# Altium PCB PCB3.PcbDoc
Units mm, origin at the board's own origin, x right, y up, seen from the top; angles counter-clockwise.
Board outline 64.01 x 99.31 mm, 4 copper layers (Top Layer, Layer 1, Layer 2, Bottom Layer), stack 0.603 mm thick; 84 components, 38 nets, 245 pads, 46 vias.
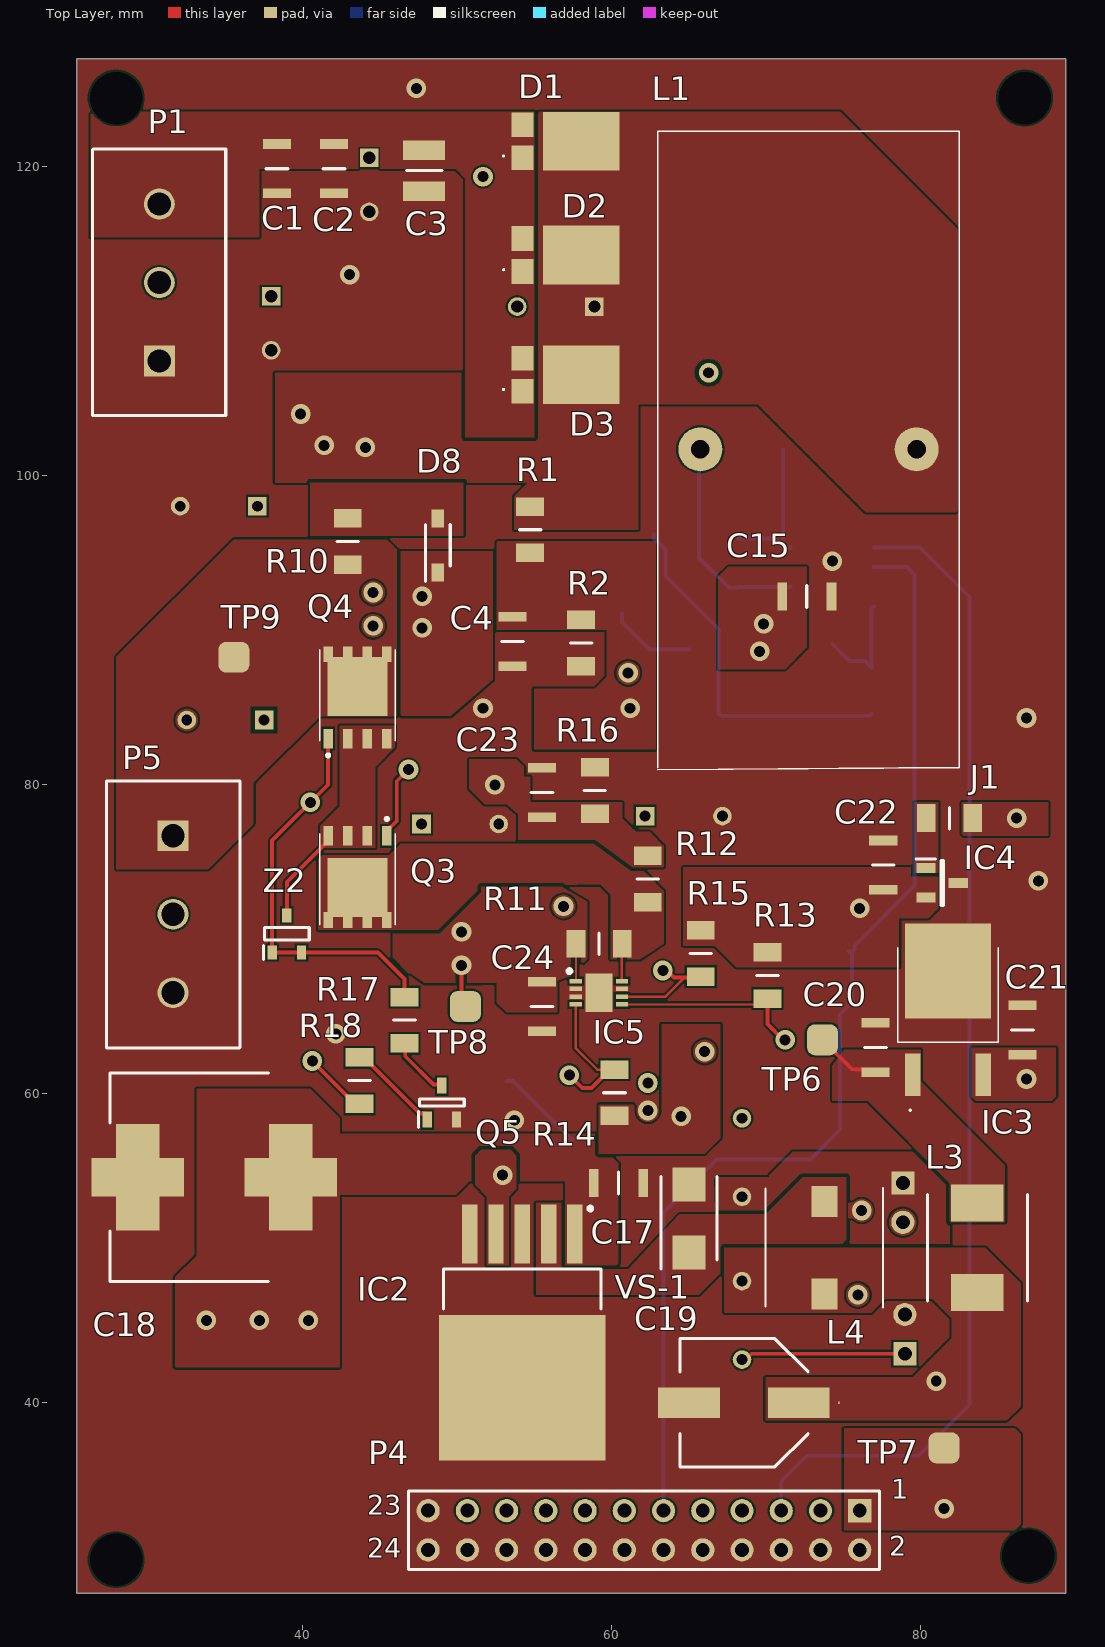
[diagram p0: Top Layer view]
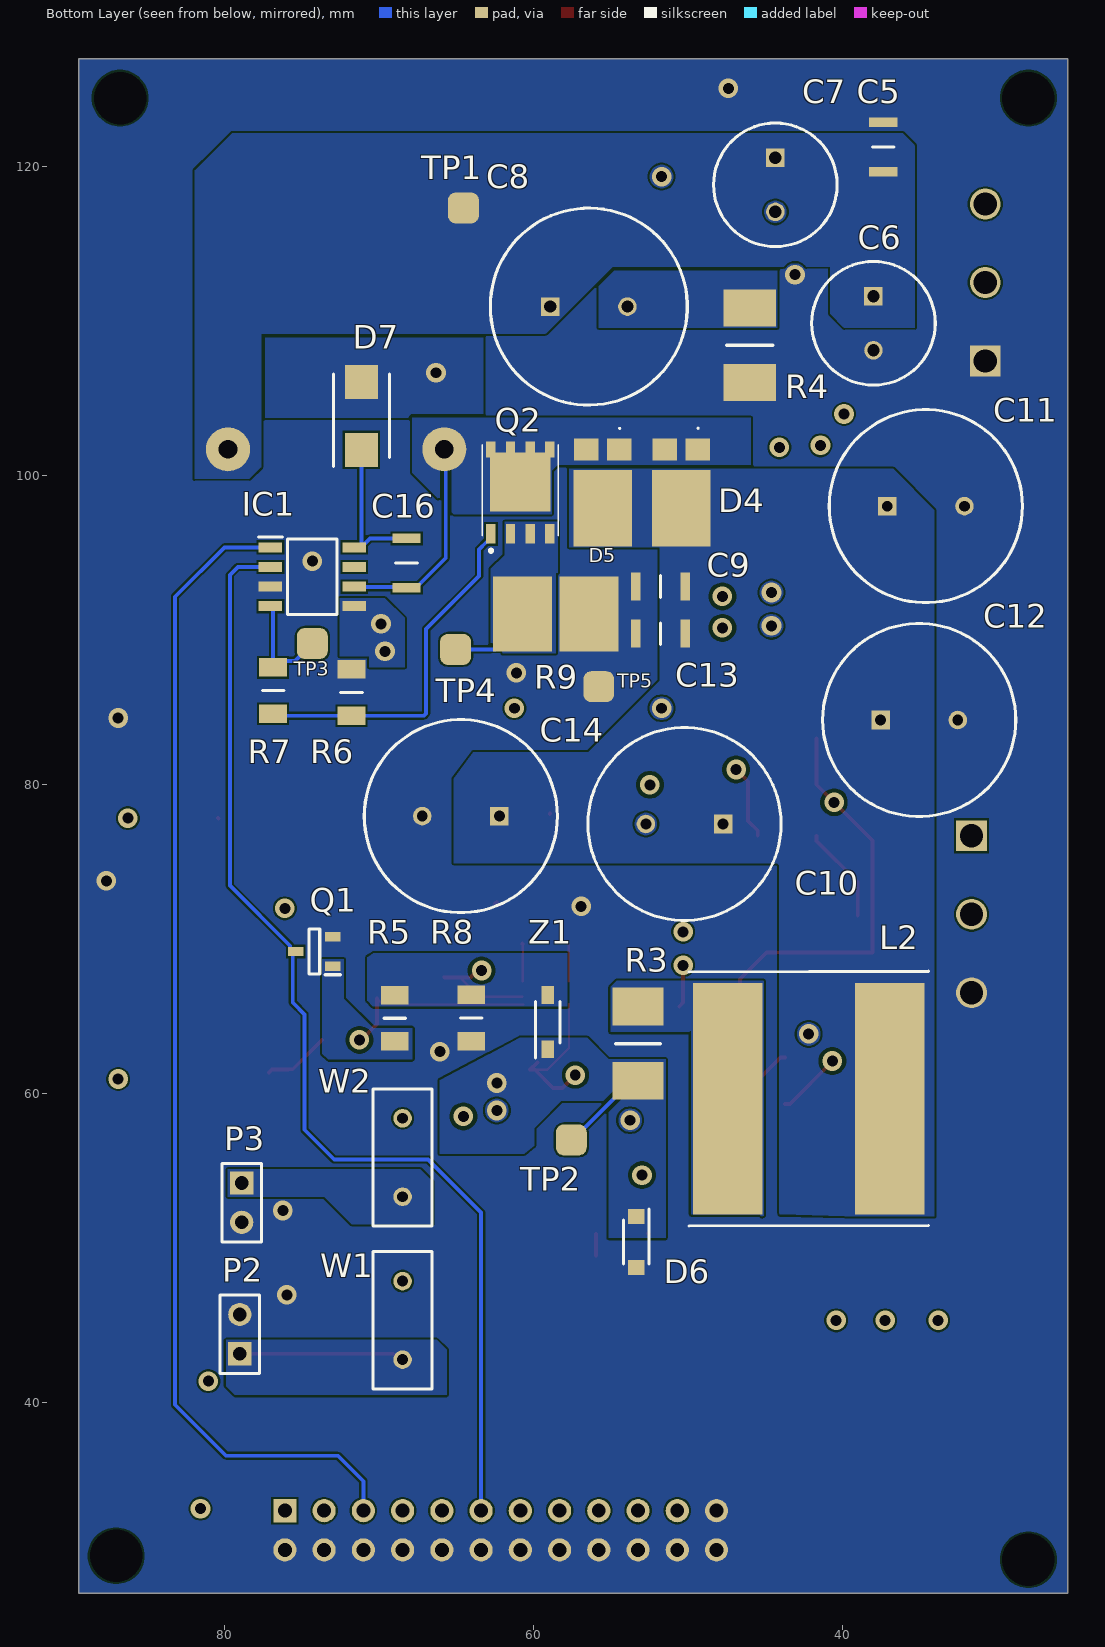
[diagram p1: Bottom Layer view, seen from below]
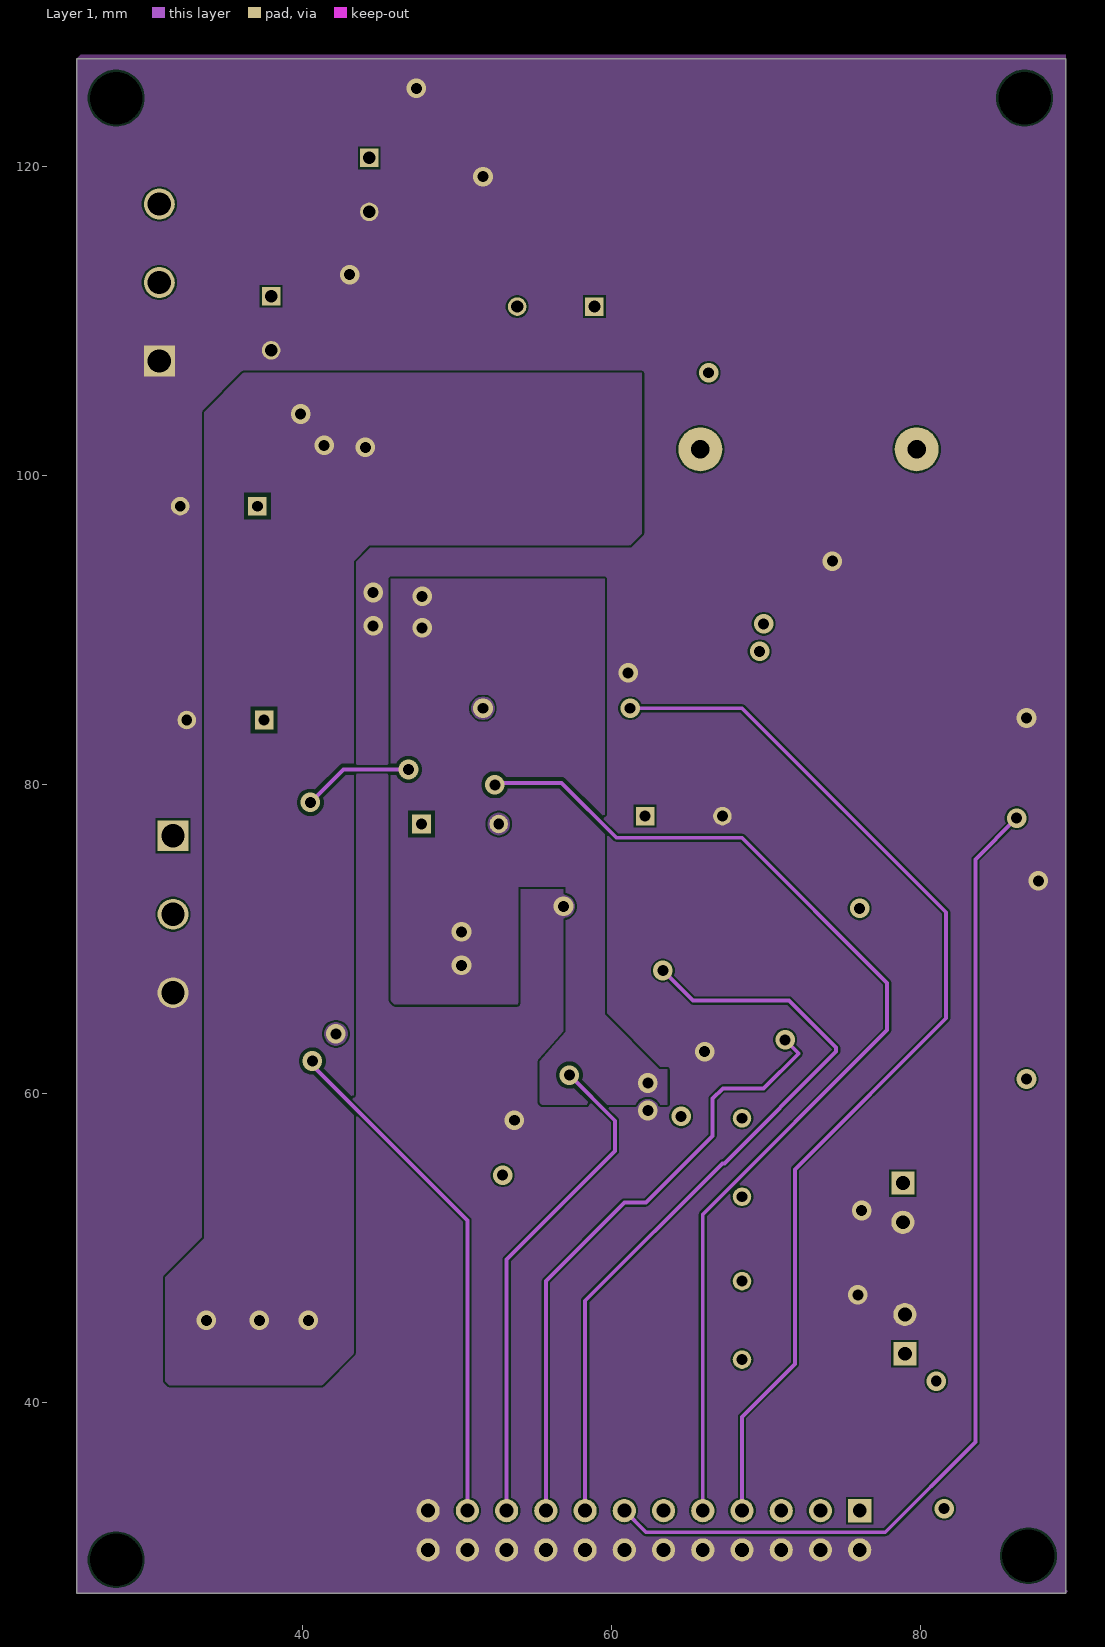
[diagram p2: Layer 1]
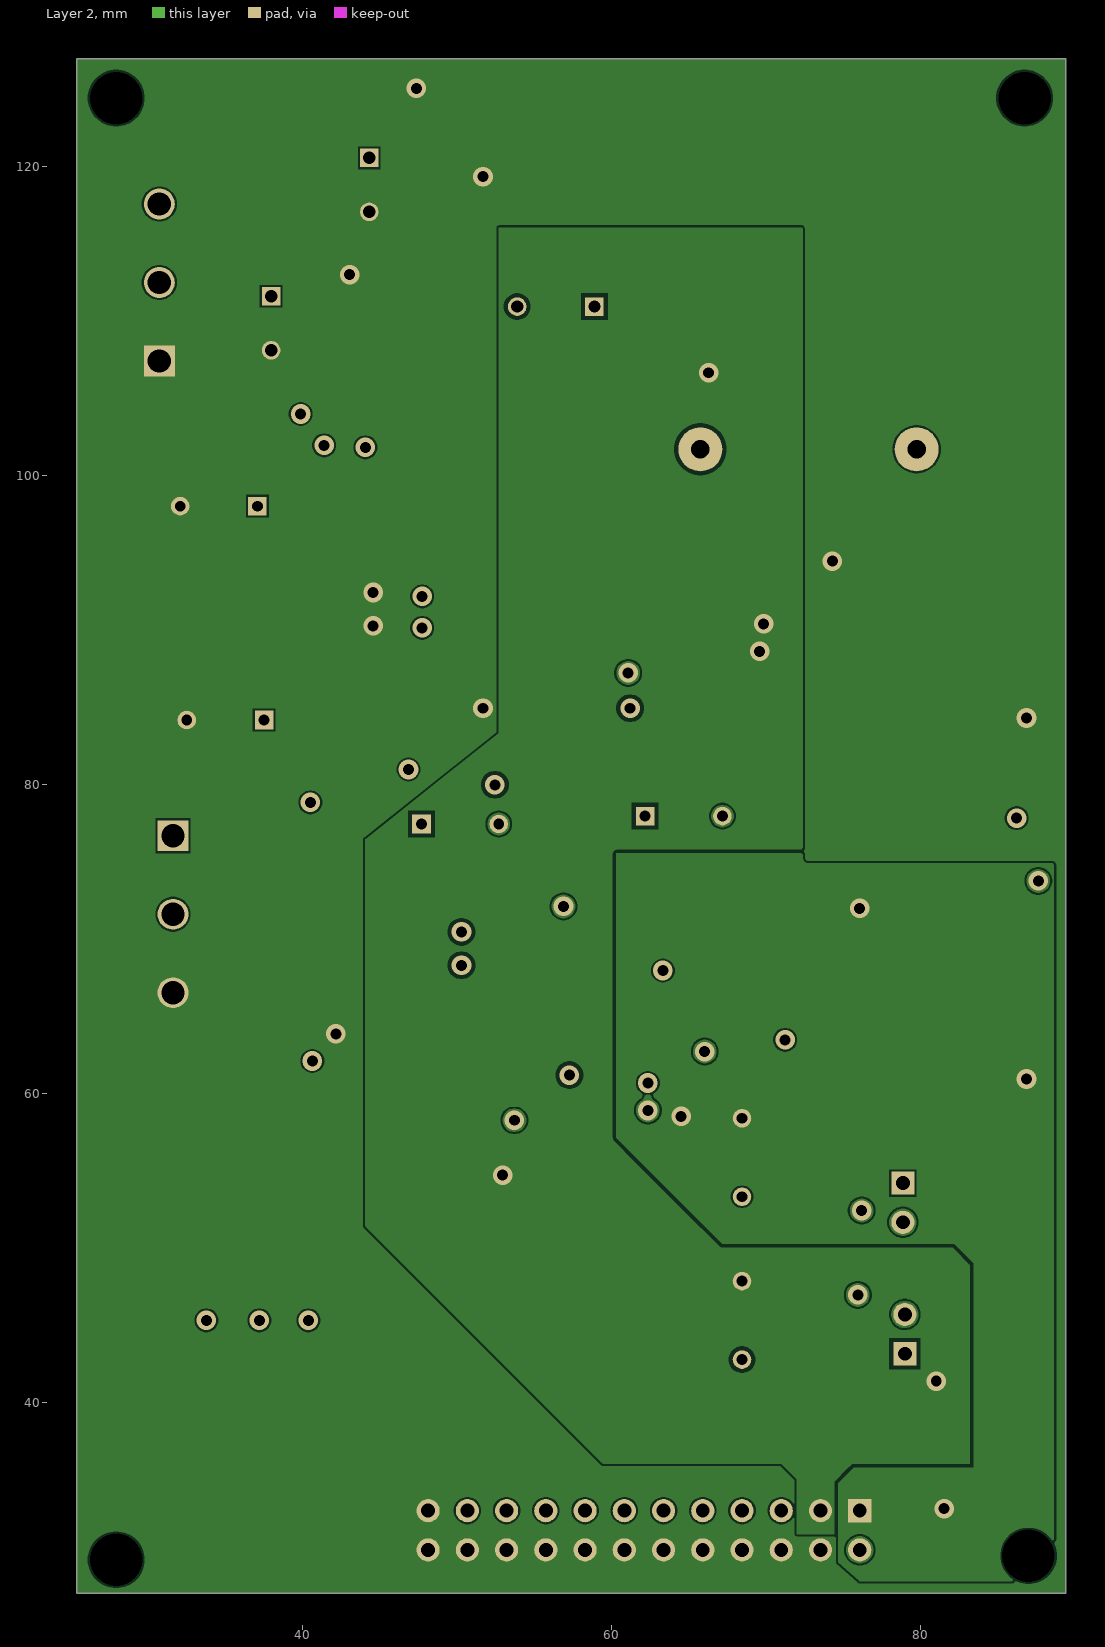
[diagram p3: Layer 2]
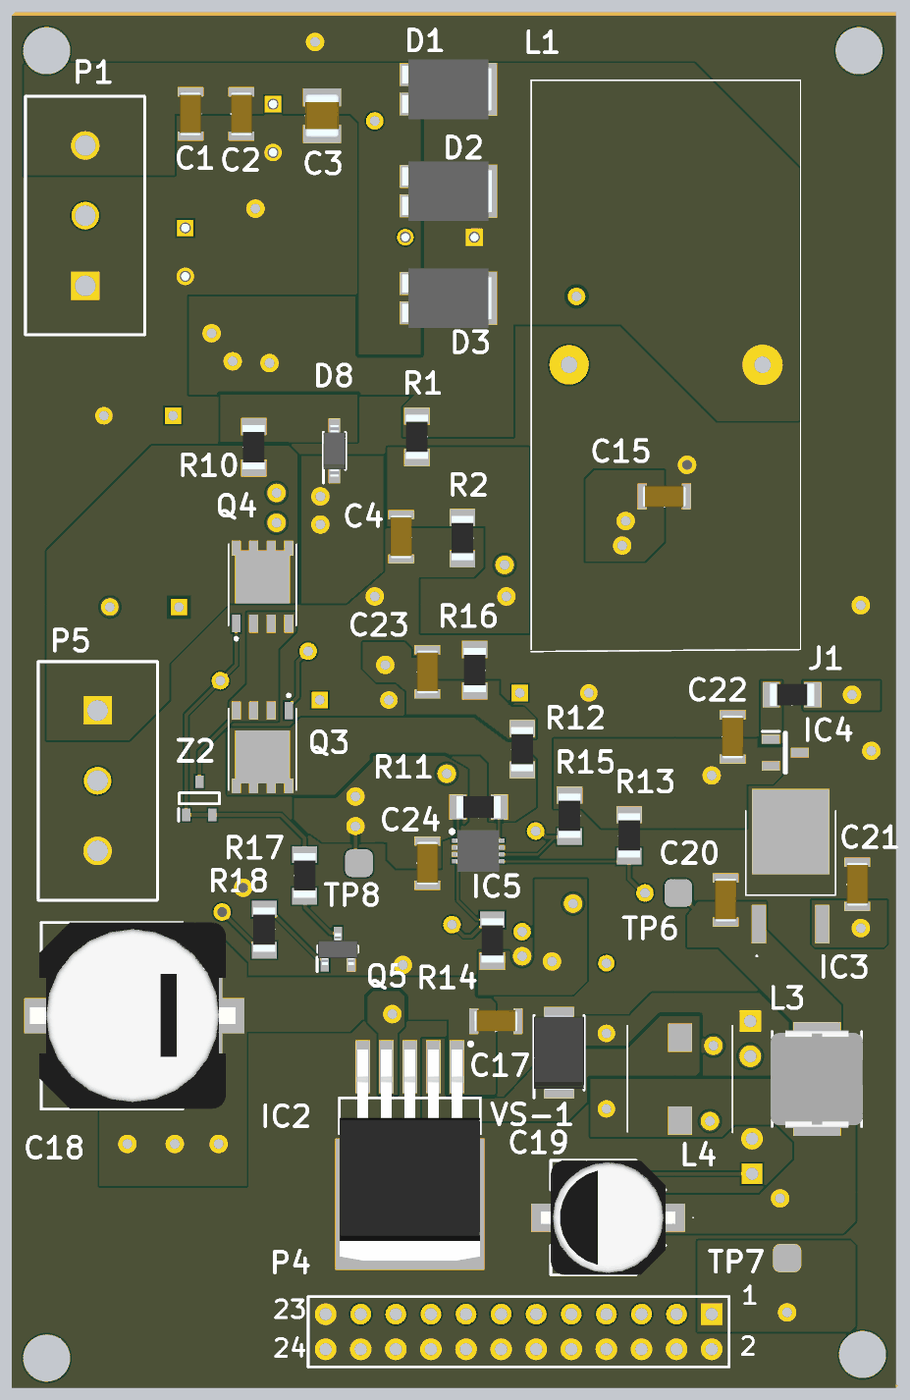
[diagram p4: 3D render of the assembled board from above, using the file's embedded part models]
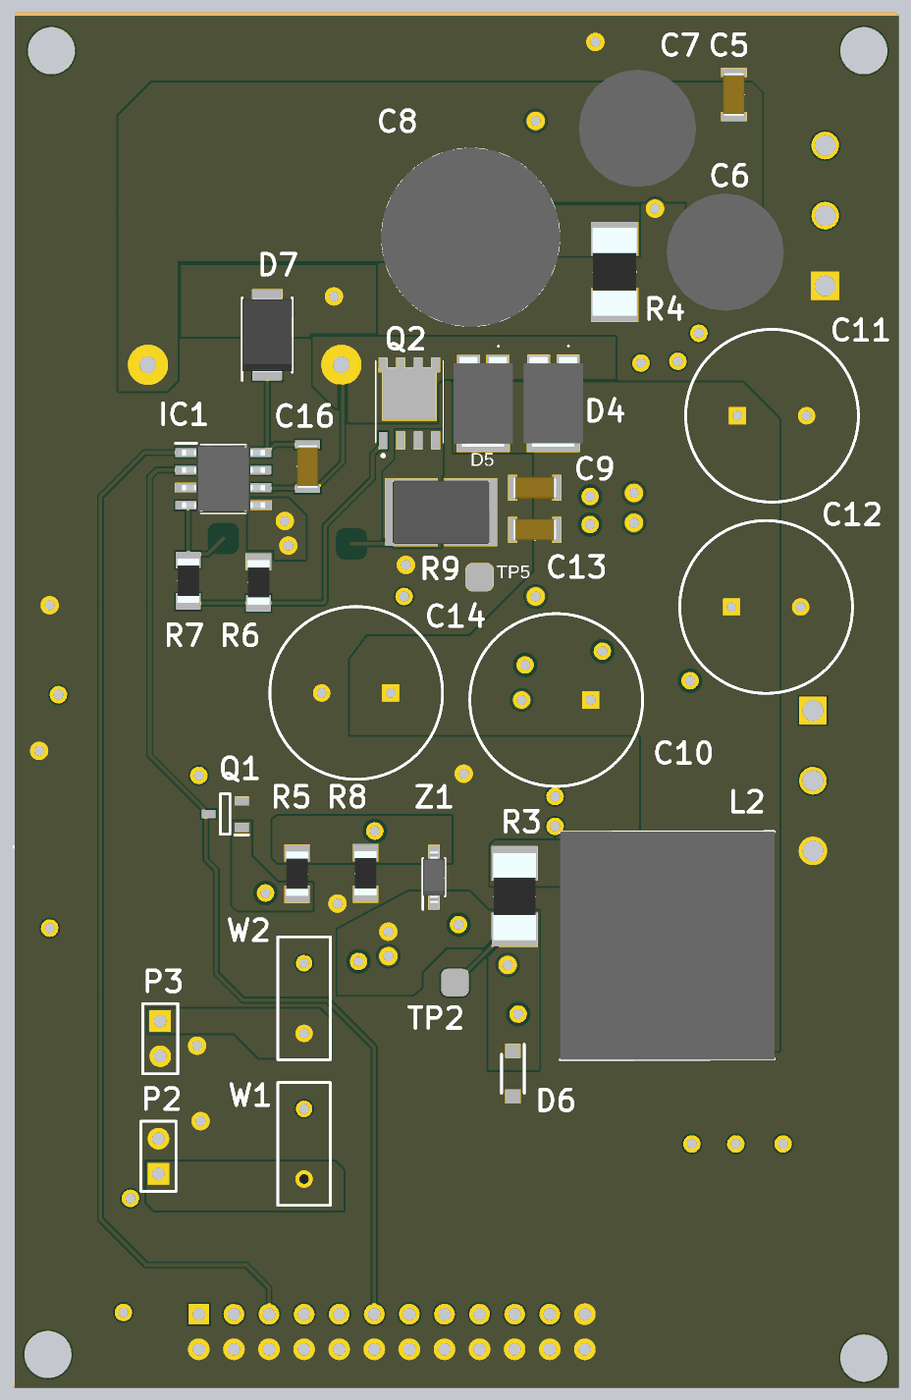
[diagram p5: 3D render of the assembled board from below, using the file's embedded part models]

## Layer stack, top to bottom
Top Solder: solder mask 0.0102, Solder Resist, Dk 3.5
Top Layer: signal copper 0.0356
Dielectric 2: prepreg 0.0711, PP-006, Dk 4.1
Layer 1: signal copper 0.035
Dielectric 1: dielectric 0.32, FR-4, Dk 4.8
Layer 2: signal copper 0.035
Dielectric 3: prepreg 0.0711, PP-006, Dk 4.1
Bottom Layer: signal copper 0.0356
Bottom Solder: solder mask 0.0102, Solder Resist, Dk 3.5

## Board outline
25.4,27.686 25.4,127 89.408,127 89.408,27.686

## Design rules (kind name [scope] priority, off if disabled: settings)
Clearance [All] p1: gap=0.125 ignorepadtopadclearanceinfootprint=FALSE except(0: Arc-Hole Track-Hole SMDPad-Hole THPad-Hole Via-Hole Fill-Hole Poly-Hole Region-Hole Text-Hole)
DiffPairsRouting [All] p1: maxlimit=10 minlimit=0.125 mostfreqgap=0.15 toplayer_minwidth=0.381 toplayer_maxwidth=0.381 toplayer_prefwidth=0.381 midlayer1_minwidth=0.381 midlayer1_maxwidth=0.381 midlayer1_prefwidth=0.381 midlayer2_minwidth=0.381 midlayer2_maxwidth=0.381 midlayer2_prefwidth=0.381 bottomlayer_minwidth=0.381 bottomlayer_maxwidth=0.381 bottomlayer_prefwidth=0.381 maxuncoupledlength=12.7
FabricationTestPointUsage FabricationTestPointUsage_1 [All] p1: valid=0 allowmultiple=FALSE
FabricationTestpoint FabricationTestpoint_1 [All] p1: side=3 testpointundercomponent=TRUE minsize=1.016 maxsize=2.54 preferedsize=1.524 minholesize=0 maxholesize=1.016 preferedholesize=0.813 testpointgrid=0.025 allowsidetop=TRUE allowsidebottom=TRUE usegrid=TRUE gridtolerance=0
Height [All] p1: minheight=0 maxheight=50 prefheight=12.7
HoleSize [All] p1: absolutevalues=TRUE maxlimit=6 minlimit=0.2 maxpercent=80.000 minpercent=20.000
HoleSize FabricationTestpoint [All] p2 off: absolutevalues=TRUE maxlimit=2.54 minlimit=0.025 maxpercent=80.000 minpercent=20.000
HoleSize FabricationTestPointUsage [All] p3 off: absolutevalues=TRUE maxlimit=2.54 minlimit=0.025 maxpercent=80.000 minpercent=20.000
MinimumSolderMaskSliver [All] p1: minsoldermaskwidth=0.07
MinimumSolderMaskSliver SilkscreenOverComponentPads [All] p2: minsoldermaskwidth=0.254
PlaneClearance [All] p1: clearance=0.5
PlaneConnect [All] p1: planeconnectstyle=Direct reliefexpansion=0.4 reliefentries=4 reliefconductorwidth=0.15 reliefairgap=0.15
PolygonConnect [All] p1: connectstyle=Direct reliefconductorwidth=0.15 reliefentries=4 polygonreliefangle="90 Angle" airgapwidth=0.254
RoutingCorners [All] p1: cornerstyle=45-Degree minsetback=1.25 maxsetback=1.25
RoutingVias [All] p1: holewidth=0.3 width=0.6 viastyle="Through Hole" minholewidth=0.2 minwidth=0.45 maxholewidth=0.45 maxwidth=0.75
SilkToSolderMaskClearance [IsPad] p1: minsilkscreentomaskgap=0.1 clearancetoexposedcopper=TRUE
SolderMaskExpansion [All] p1: expansion=0.03 istentingtop=FALSE
Width [All] p1: maxlimit=10 minlimit=0.125 preferedwidth=0.15
20 further rules are at their usual default settings.

## Classes and differential pairs
component class U_Power_Supply: C17 C18 C19 C20 C21 C22 IC2 IC3 IC4 J1 L3 L4 P2 P3 TP6 TP7 VS-1 W1 W2
component class U_Output_Stage: C23 C24 D8 IC5 P5 Q3 Q4 Q5 R10 R11 R12 R13 R14 R15 R16 R17 R18 TP8 TP9 Z2
component class U_Input_Stage: C1 C2 C3 C4 D1 D2 D3 P1 R1 R2
component class U_Boost_Converter: C5 C6 C7 C8 C9 C10 C11 C12 C13 C14 C15 C16 D4 D5 D6 D7 IC1 L1 L2 Q1 Q2 R3 R4 R5 R6 R7 R8 R9 TP1 TP2 TP3 TP4 TP5 Z1

## Components (designator, comment, footprint, x,y, rotation, side; value= is the part's Value field where it differs from the comment)
C1 "10nF" CAPC3216X180N 38.354,119.888 r90 top value=100nF
C2 "100µF" CAPC3216X180N 42.037,119.888 r90 top value=10nF
C3 "GRM32EC72A106KE05K" CAPC3225X270N 47.879,119.761 r90 top value=10uF
C4 "220pF" CAPC3216X180N 53.594,89.281 r90 top
C5 "CC1206KKX7R0BB104" CAPC3216X180N 37.338,121.285 r90 bottom value=100nF
C6 "870056174001" 870056174001 37.973,111.633 r270 bottom value=10µF
C7 "870056174001" 870056174001 44.323,120.594 r270 bottom value=10µF
C8 "100ZLJ220M12.5X25" CAPPRD500W60D1275H2700 58.899,110.964 r180 bottom value=220uF
C9 "CC1206KKX7R0BB104" CAPC3216X180N 51.765,92.837 r0 bottom value=100nF
C10 "EGXF251ELL680MK30S" EGXF251ELL680MK30S 47.705,77.47 r0 bottom value=68µF
C11 "EGXF251ELL680MK30S" EGXF251ELL680MK30S 37.084,98.044 r180 bottom value=68µF
C12 "EGXF251ELL680MK30S" EGXF251ELL680MK30S 37.512,84.201 r180 bottom value=68µF
C13 "C1206C105M5REC7210" CAPC3216X180N 51.765,89.789 r180 bottom value=1µF
C14 "EGXF251ELL680MK30S" EGXF251ELL680MK30S 62.183,77.978 r0 bottom value=68µF
C15 "100nF" CAPC3216X180N 72.644,92.202 r180 top
C16 "330nF" CAPC3216X180N 68.199,94.361 r90 bottom
C17 "CC1206KKX7R0BB104" CAPC3216X180N 60.452,54.229 r180 top value=100nF
C18 "EEV-FK1K101V" EEEFK0J332AV 34.29,54.61 r90 top value=100µF
C19 "EEEFK1E331P" EEE0JA471UAP 68.58,40.005 r180 top value=330µF
C20 "C1206C105M5REC7210" CAPC3216X180N 77.089,62.992 r270 top value=1µF
C21 "CC1206KKX7R0BB104" CAPC3216X180N 86.614,64.135 r270 top value=100nF
C22 "CC1206KKX7R0BB104" CAPC3216X180N 77.597,74.803 r270 top value=100nF
C23 "220pF" CAPC3216X180N 55.499,79.502 r270 top
C24 "CC1206KKX7R0BB104" CAPC3216X180N 55.499,65.659 r90 top value=100nF
D1 "PMEG45U10" PMEG45U10EPDZ 57.019,121.666 r270 top
D2 "PMEG45U10" PMEG45U10EPDZ 57.023,114.3 r270 top
D3 "PMEG45U10" PMEG45U10EPDZ 57.019,106.553 r270 top
D4 "PMEG100V100ELPDAZ" PMEG100V100ELPDAZ 50.419,98.937 r0 bottom
D5 "PMEG100V100ELPDAZ" PMEG100V100ELPDAZ 55.499,98.933 r0 bottom
D6 "SMF4L60A-Q" SODFL3716X135N 53.34,50.419 r270 bottom
D7 "VS-10BQ060-M3_5BT" DIOM5436X244N 71.12,103.886 r90 bottom
D8 "1N4148W-G3-08" SOD3716X135N 48.768,95.504 r90 top
IC1 "IR7184STRPBF" SOIC127P600X175-8N 74.295,93.472 r180 bottom
IC2 "TL2575HV-12IKTTR" TO170P1524X483-6N 54.229,44.527 r270 top
IC3 "UA78M33CKVURG3" TPS7A6533QKVURQ1 81.788,61.245 r90 top
IC4 "MCP100T-315I_TT" SOT96P237X112-3N 81.407,73.66 r0 top
IC5 "LTC2944CDD#PBF" SON50P300X300X80-9N-D 59.182,66.548 r0 top
J1 "MCWR12X000 PTL" RESC3216X75N 81.891,77.851 r0 top value=0
L1 "SHBC20-1R7A0054V" SHBC201R7A0054V 72.756,101.727 r180 top value=54uH
L2 "SRP1580CA-2R0M" SRP1510CA100M 42.164,59.69 r270 bottom value=2uH
L3 "22uH" INDPM6965X300N 83.693,50.038 r90 top
L4 "330uH" WE-PD_7332/7345_PLASTIC_BASE54 73.787,50.038 r0 top
P1 "MSTBVA2,5/3-G-5,08" HDR1X3 35.034,103.902 r90 top
P2 "Header 2" HDR1X2 78.994,43.18 r90 bottom
P3 "Header 2" HDR1X2 78.867,54.229 r270 bottom
P4 "Header 12X2" HDR2X12 76.073,33.02 r180 top
P5 "MSTBVA2,5/3-G-5,08" HDR1X3 27.323,80.248 r270 top
Q1 "MMBT2222ALT1G" SOT96P237X111-3N 74.168,69.215 r0 bottom
Q2 "SIR120DP-T1-RE3" SI7141DPT1GE3 60.833,99.06 r90 bottom
Q3 "SI7155DP-T1-GE3" SI7141DPT1GE3 43.561,73.898 r270 top
Q4 "SI7155DP-T1-GE3" SI7141DPT1GE3 43.561,85.81 r90 top
Q5 "FMMT493ATA" SOT95P230X110-3N 49.022,59.436 r90 top
R1 "100KΩ" RESC3216X75N 54.737,96.52 r90 top value=100k
R2 "8.2KΩ" RESC3216X75N 58.039,89.178 r90 top value=8.2k
R3 "CRM2512-FX-R100ELF" RESC6331X80N 53.213,63.246 r270 bottom value=100m
R4 "35221R0JT" RESC6432X120N 45.974,108.458 r90 bottom value=1
R5 "100Ω" RESC3216X75N 68.961,64.897 r270 bottom value=100
R6 "MCWR12X4702FTL" RESC3216X75N 71.755,85.979 r270 bottom value=47k
R7 "MCWR12W8R20FTL" RESC3216X75N 76.835,86.106 r270 bottom value=8.2
R8 "1KΩ" RESC3216X75N 64.008,64.921 r90 bottom value=1k
R9 "WSHM2818R0500FEB" RESC7146X175N 58.538,91.059 r0 bottom value=50m
R10 "MCWR12X1002FTL" RESC3216X75N 42.926,95.758 r270 top value=10k
R11 "ERJ8BWFR015V" RESC3216X75N 59.206,69.723 r0 top value=0.015
R12 "100KΩ" RESC3216X75N 62.357,73.914 r270 top value=100k
R13 "MCHP06W2F1001T5E" RESC3216X75N 70.104,67.667 r90 top value=1k
R14 "MCHP06W2F1001T5E" RESC3216X75N 60.198,60.071 r270 top value=1k
R15 "MCHP06W2F1001T5E" RESC3216X75N 65.786,69.088 r90 top value=1k
R16 "8.2KΩ" RESC3216X75N 58.928,79.629 r270 top value=8.2k
R17 "MCWR12X1003FTL" RESC3216X75N 46.609,64.77 r90 top value=100k
R18 "MCHP06W2F1001T5E" RESC3216X75N 43.688,60.857 r90 top value=1k
TP1 "test point" "Test point" 56.769,173.228 r180 bottom
TP2 "test point" "Test point" 49.784,112.903 r180 bottom
TP3 "test point" "Test point" 66.548,145.034 r180 bottom
TP4 "test point" "Test point" 57.277,144.653 r180 bottom
TP5 "test point" "Test point" 63.5,30.48 r0 bottom
TP6 "test point" "Test point" 81.407,119.38 r0 top
TP7 "test point" "Test point" 89.281,92.964 r0 top
TP8 "test point" "Test point" 58.293,121.539 r0 top
TP9 "test point" "Test point" 43.307,144.145 r0 top
VS-1 "Diode_2" DIOM5436X244N 65.024,51.943 r90 top
W1 "Jumper" RAD-0.2 68.453,45.339 r90 bottom
W2 "Jumper" RAD-0.2 68.453,55.88 r90 bottom
Z1 "MMSZ5263BT1G" SOD3716X135N 59.055,64.643 r90 bottom
Z2 "BZX84C12VLFHT116" SOT95P240X115-3N 38.989,70.358 r90 top

## Footprints (in the part's own frame and the unit in brackets; to place one, negate y for a bottom-side part, rotate by r counter-clockwise, add the part's x,y. Pads: shape width x height; smd on the part's side, far side on the other; paste and mask are expansions set on the pad)
870056174001 [mm] "10uF"
  rect 1.2x1.2 hole 0.8: 1(0,0)
  round 1.2 hole 0.8: 2(3.5,0)
  silkscreen extent -2.25,-4 5.75,4, body extent -2.5,-4.25 6,4.25, height 9
CAPC3216X180N [mm]
  rect 0.62x1.82 smd: 1(-1.6,0) 2(1.6,0)
  silkscreen extent 0,-0.7 0,0.7, body extent -1.6,-0.8 1.6,0.8, height 1.8
CAPC3225X270N [mm]
  rect 1.26x2.72 smd: 1(-1.33,0) 2(1.33,0)
  silkscreen extent 0,-1.15 0,1.15, body extent -1.6,-1.25 1.6,1.25, height 2.7
CAPPRD500W60D1275H2700 [mm]
  rect 1.2x1.2 hole 0.8: 1(0,0)
  round 1.2 hole 0.8: 2(5,0)
  silkscreen extent -3.88,-6.37 8.87,6.37, body extent -4,-6.5 9,6.5, height 27
DIOM5436X244N [mm]
  rect 2.2x2.15 smd: 1(-2.2,0) 2(2.2,0)
  silkscreen extent -3.27,-1.81 2.7,1.81, body extent -2.7,-1.81 2.7,1.81, height 2.44
EEE0JA471UAP [mm]
  rect 4x2 smd: 1(-3.55,0) 2(3.55,0)
  silkscreen extent -6.18,-4.15 4.15,4.15, body extent 0,0 0,0
EEEFK0J332AV [mm]
  rect 2.2x2.8 smd: 1(-2.35,-4.95) 1(2.35,-4.95) 2(-2.35,4.95) 2(2.35,4.95)
  rect 2.5x6 smd: 1(0,-4.95) 2(0,4.95)
  silkscreen extent -6.75,-3.5 6.75,6.75, body extent -6.73,-7.32 6.77,7.58, height 13.8
EGXF251ELL680MK30S [mm] "68uF"
  rect 1.2x1.2 hole 0.7: 1(0,0)
  round 1.2 hole 0.7: 2(5,0)
  silkscreen extent -3.75,-6.25 8.75,6.25, body extent -3.71,-6.25 8.79,6.25, height 8
HDR1X2 [mm] "Connector; Header; 2 Position"
  rect 1.5x1.5 hole 0.9: 1(0,0)
  round 1.5 hole 0.9: 2(2.54,0)
  silkscreen extent -1.27,-1.27 3.81,1.27
HDR1X3 [mm] "Connector; Header; 3 Position"
  rect 2x2 hole 1.5: 1(3.54,4.3)
  round 2 hole 1.5: 2(8.62,4.3) 3(13.7,4.3)
  silkscreen extent 0,0 17.27,8.64
HDR2X12 [mm] "Connector; Header; 12x2 Position"
  rect 1.5x1.5 hole 0.9: 1(0,0)
  round 1.5 hole 0.9: 2(0,2.54) 3(2.54,0) 4(2.54,2.54) 5(5.08,0) 6(5.08,2.54) 7(7.62,0) 8(7.62,2.54) 9(10.16,0) 10(10.16,2.54) 11(12.7,0) 12(12.7,2.54) 13(15.24,0) 14(15.24,2.54) 15(17.78,0) 16(17.78,2.54) 17(20.32,0) 18(20.32,2.54) 19(22.86,0) 20(22.86,2.54) 21(25.4,0) 22(25.4,2.54) 23(27.94,0) 24(27.94,2.54)
  silkscreen extent -1.27,-1.27 29.21,3.81
INDPM6965X300N [mm]
  rect 2.4x3.4 smd: 1(-2.9,0) 2(2.9,0)
  silkscreen extent -3.43,-3.23 3.43,3.23, body extent -3.54,-3.33 3.53,3.34, height 2.89
PMEG45U10EPDZ [mm]
  rect 1.6x1.44 smd: 1(1.065,-2.78) 2(-1.065,-2.78)
  rect 3.8x4.96 smd: 3(0,1.02)
  silkscreen extent 0.9,-4.05 1,-3.95, body extent -2.15,-3.36 2.15,3.12, height 0.92
PMEG100V100ELPDAZ [mm]
  rect 1.6x1.44 smd: 1(-1.065,-2.78) 2(1.065,-2.78)
  rect 3.8x4.96 smd: 3(0,1.02)
  silkscreen extent -1.15,-4.2 -1.05,-4.1, body extent -2.15,-3.36 2.15,3.12, height 0.92
RAD-0.2 [mm] "Radial Cap, Thru-Hole; 2 Leads; 0.2 in Pin Spacing"
  round 1.2 hole 0.7: 1(-2.54,0) 2(2.54,0)
  silkscreen extent -4.44,-1.91 4.44,1.91
RESC3216X75N [mm]
  rect 1.2x1.8 smd: 1(-1.5,0) 2(1.5,0)
  silkscreen extent 0,-0.7 0,0.7, body extent -1.6,-0.8 1.6,0.8, height 0.75
RESC6331X80N [mm]
  rect 2.45x3.3 smd: 1(-2.4,0) 2(2.4,0)
  silkscreen extent 0,-1.45 0,1.45, body extent -3.15,-1.55 3.15,1.55, height 0.8
RESC6432X120N [mm]
  rect 2.4x3.4 smd: 1(-2.4,0) 2(2.4,0)
  silkscreen extent 0,-1.5 0,1.5, body extent -3.17,-1.6 3.17,1.6, height 1.2
RESC7146X175N [mm]
  rect 3.8x4.85 smd: 1(-2.15,0) 2(2.15,0)
  body extent -3.55,-2.3 3.55,2.3, height 1.5
SHBC201R7A0054V [mm]
  round 2.85 hole 1.2: 1(-7,0) 2(7,0)
  silkscreen extent -9.75,-20.6 9.75,20.75, body extent -9.78,-20.64 9.78,20.7, height 41.2
SI7141DPT1GE3 [mm]
  rect 1.27x0.61 smd: 1(-2.81,1.905) 2(-2.81,0.635) 3(-2.81,-0.635) 4(-2.81,-1.905)
  rect 3.81x3.91 smd: 5(0.55,0)
  rect 0.32x0.255 smd: 5(2.3,-2.083) 5(2.3,2.083)
  rect 0.71x0.61 smd: 5(2.81,-1.905) 5(2.81,-0.635) 5(2.81,1.905) 7(2.81,0.635)
  silkscreen extent -4,-2.45 2.95,2.45
SOD3716X135N [mm]
  rect 1.15x0.8 smd: 1(-1.75,0) 2(1.75,0)
  silkscreen extent -2.32,-0.8 1.35,0.8, body extent -1.86,-0.8 1.86,0.8, height 1.35
SODFL3716X135N [mm]
  rect 0.98x1.07 smd: 1(-1.65,0) 2(1.65,0)
  silkscreen extent -2.14,-0.82 1.41,0.82, body extent -1.85,-0.82 1.85,0.82, height 1.35
SOIC127P600X175-8N [mm]
  rect 1.525x0.65 smd: 1(-2.712,1.905) 2(-2.712,0.635) 3(-2.712,-0.635) 4(-2.712,-1.905) 5(2.712,-1.905) 6(2.712,-0.635) 7(2.712,0.635) 8(2.712,1.905)
  silkscreen extent -3.47,-2.45 1.6,2.58, body extent -3,-2.45 3,2.45, height 1.75
SON50P300X300X80-9N-D [mm]
  rect 0.8x0.3 smd: 1(-1.5,0.75) 2(-1.5,0.25) 3(-1.5,-0.25) 4(-1.5,-0.75) 5(1.5,-0.75) 6(1.5,-0.25) 7(1.5,0.25) 8(1.5,0.75)
  rect 1.75x2.48 smd: 9(0,0)
  silkscreen extent -2.02,1.28 -1.77,1.52, body extent -1.55,-1.5 1.55,1.5, height 0.8
SOT95P230X110-3N [mm]
  rect 1.05x0.6 smd: 1(-1.1,0.95) 2(-1.1,-0.95) 3(1.1,0)
  silkscreen extent -1.63,-1.45 0.23,1.5, body extent -1.15,-1.45 1.15,1.45, height 1.1
SOT95P240X115-3N [mm]
  rect 0.9x0.6 smd: 1(-1.2,0.95) 2(-1.2,-0.95) 3(1.2,0)
  silkscreen extent -1.65,-1.45 0.4,1.5, body extent -1.2,-1.45 1.2,1.45, height 1.15
SOT96P237X111-3N [mm]
  rect 1x0.6 smd: 1(-1.2,0.955) 2(-1.2,-0.955) 3(1.2,0)
  silkscreen extent -1.7,-1.46 0.35,1.51, body extent -1.18,-1.46 1.18,1.46, height 1.11
SOT96P237X112-3N [mm]
  rect 1.25x0.65 smd: 1(-1.05,0.96) 2(-1.05,-0.96) 3(1.05,0)
  silkscreen extent -1.68,-1.46 0.08,1.54, body extent -1.18,-1.46 1.18,1.46, height 1.12
SRP1510CA100M [mm]
  rect 15x4.5 smd: 1(0,5.25) 2(0,-5.25)
  silkscreen extent -8.25,-7.75 8.25,7.75, body extent -8.25,-7.75 8.25,7.75, height 10.1
"Test point" [mm]
  rrect50% 2x2 smd: 5(-7.747,-55.88)
TO170P1524X483-6N [mm]
  rect 3.8x1 smd: 1(-6.4,3.4) 2(-6.4,1.7) 3(-6.4,0) 4(-6.4,-1.7) 5(-6.4,-3.4)
  rect 9.45x10.75 smd: 6(3.55,0)
  silkscreen extent -8.17,-5.1 -1.55,5.1, body extent -7.65,-5.08 7.62,5.08, height 4.44
TPS7A6533QKVURQ1 [mm]
  rect 2.75x1 smd: 1(0,2.29) 3(0,-2.29)
  rect 6.15x5.55 smd: 2(6.7,0)
  silkscreen extent -2.35,-3.25 8.2,3.25, body extent -5.98,-3.26 4.13,3.26, height 2.31
WE-PD_7332/7345_PLASTIC_BASE54 [mm]
  rect 1.7x2 smd: 1(0,3) 2(0,-3)
  silkscreen extent -3.8,-3.86 3.8,3.86

## Part data
C1 C15: library part CC1206KKX7R0BB104, "Capacitor 100nF", LatestRevisionDate=17-Jul-2002, LatestRevisionNote="Re-released for DXP Platform.", PackageDescription="Radial Cap, Thru-Hole; 2 Leads; 0.3 in Pin Spacing", PackageReference=RAD-0.3, Published=8-Jun-2000, Publisher="Altium Limited", Supplier 1=Farnell
C2: library part C1206C103K1RACTU, "Capacitor 10nF", LatestRevisionDate=17-Jul-2002, LatestRevisionNote="Re-released for DXP Platform.", PackageDescription="Radial Cap, Thru-Hole; 2 Leads; 0.3 in Pin Spacing", PackageReference=RAD-0.3, Published=8-Jun-2000, Publisher="Altium Limited", Supplier 1=Mouser
C3: "Ceramic capacitor 10uF", Manufacturer_Name="Murata Electronics", Mouser Part Number=81-GRM32EC72A106KE5K, Arrow Part Number=GRM32EC72A106KE05K, Arrow Price/Stock=https://www.arrow.com/en/products/grm32ec72a106ke05k/murata-manufacturing?region=nac, Height=2.7mm, Manufacturer_Part_Number=GRM32EC72A106KE05K, Mouser Price/Stock=https://www.mouser.co.uk/ProductDetail/Murata-Electronics/GRM32EC72A106KE05K?qs=rrS6PyfT74e65RehvwNPbw%3D%3D
C4 C23: library part VJ1206A221JXBCW1BC, "Capacitor 220pF", LatestRevisionDate=17-Jul-2002, LatestRevisionNote="Re-released for DXP Platform.", PackageDescription="Radial Cap, Thru-Hole; 2 Leads; 0.3 in Pin Spacing", PackageReference=RAD-0.3, Published=8-Jun-2000, Publisher="Altium Limited", Supplier 1=Mouser
C5 C9 C17 C21 C22 C24: "Capacitor 100nF", LatestRevisionDate=17-Jul-2002, LatestRevisionNote="Re-released for DXP Platform.", PackageDescription="Radial Cap, Thru-Hole; 2 Leads; 0.3 in Pin Spacing", PackageReference=RAD-0.3, Published=8-Jun-2000, Publisher="Altium Limited", Supplier 1=Farnell
C6 C7: "Capacitor Polarised 10uF", Manufacturer_Name=Panasonic, Manufacturer_Part_Number=EEV-FK1K101V, Mouser Part Number=667-EEV-FK1K101V, Datasheet Link=http://industrial.panasonic.com/cdbs/www-data/pdf/RDE0000/ABA0000C1181.pdf, Height=14.3mm, Mouser Price/Stock=https://www.mouser.co.uk/ProductDetail/Panasonic/EEV-FK1K101V?qs=MtOUKumLmnbTFvRMlB7%2FdA%3D%3D
C8: "Capacitor Polarised", Manufacturer_Name=Rubycon, Mouser Part Number=232-100ZLJ220M125X25, Arrow Part Number=100ZLJ220M12.5X25, Arrow Price/Stock=https://www.arrow.com/en/products/100zlj220m12.5x25/rubycon, Datasheet Link=https://componentsearchengine.com/Datasheets/2/100ZLJ220M12.5X25.pdf, Height=27mm, Manufacturer_Part_Number=100ZLJ220M12.5X25, Mouser Price/Stock=https://www.mouser.com/Search/Refine.aspx?Keyword=232-100ZLJ220M125X25
C10 C11 C12 C14: "Capacitor 68uF", Manufacturer_Name=Panasonic, Manufacturer_Part_Number=EEV-FK1K101V, Mouser Part Number=667-EEV-FK1K101V, Datasheet Link=http://industrial.panasonic.com/cdbs/www-data/pdf/RDE0000/ABA0000C1181.pdf, EGXF251ELL680MK30S=68µF, Height=14.3mm, Mouser Price/Stock=https://www.mouser.co.uk/ProductDetail/Panasonic/EEV-FK1K101V?qs=MtOUKumLmnbTFvRMlB7%2FdA%3D%3D
C13 C20: "Capacitor 1uF", LatestRevisionDate=17-Jul-2002, LatestRevisionNote="Re-released for DXP Platform.", PackageDescription="Radial Cap, Thru-Hole; 2 Leads; 0.3 in Pin Spacing", PackageReference=RAD-0.3, Published=8-Jun-2000, Publisher="Altium Limited", Supplier 1=Farnell
C16: library part C3216X7R2A334K130AA, "Capacitor 330nF", LatestRevisionDate=17-Jul-2002, LatestRevisionNote="Re-released for DXP Platform.", PackageDescription="Radial Cap, Thru-Hole; 2 Leads; 0.3 in Pin Spacing", PackageReference=RAD-0.3, Published=8-Jun-2000, Publisher="Altium Limited", Supplier 1=Mouser
C18: "Capacitor 100uF", Manufacturer_Name=Panasonic, Mouser Part Number=667-EEV-FK1K101V, Datasheet Link=http://industrial.panasonic.com/cdbs/www-data/pdf/RDE0000/ABA0000C1181.pdf, Height=14.3mm, Manufacturer_Part_Number=EEV-FK1K101V, Mouser Price/Stock=https://www.mouser.co.uk/ProductDetail/Panasonic/EEV-FK1K101V?qs=MtOUKumLmnbTFvRMlB7%2FdA%3D%3D, Supplier 1=Mouser
C19: "Capacitor 330uF", Manufacturer_Name=Panasonic, Manufacturer_Part_Number=EEV-FK1K101V, Mouser Part Number=667-EEV-FK1K101V, Datasheet Link=http://industrial.panasonic.com/cdbs/www-data/pdf/RDE0000/ABA0000C1181.pdf, Height=14.3mm, Mouser Price/Stock=https://www.mouser.co.uk/ProductDetail/Panasonic/EEV-FK1K101V?qs=MtOUKumLmnbTFvRMlB7%2FdA%3D%3D, Supplier 1=Mouser
D1 D2 D3: library part PMEG45U10EPDZ, "Schottky Diode", Manufacturer_Name=Nexperia, Mouser Part Number=771-PMEG45U10EPDZ, Arrow Part Number=PMEG45U10EPDZ, Arrow Price/Stock=https://www.arrow.com/en/products/pmeg45u10epdz/nexperia, Datasheet Link=https://assets.nexperia.com/documents/data-sheet/PMEG45U10EPD.pdf, Height=0.82mm, Manufacturer_Part_Number=PMEG45U10EPDZ, Mouser Price/Stock=https://www.mouser.co.uk/ProductDetail/Nexperia/PMEG45U10EPDZ?qs=M%2FOdCRO8QQ0v3Dd16sTKSg%3D%3D
D4 D5: "Diode", Manufacturer_Name=Nexperia, Mouser Part Number=771-MEG100V100ELPDAZ, Arrow Part Number=PMEG100V100ELPDAZ, Arrow Price/Stock=https://www.arrow.com/en/products/pmeg100v100elpdaz/nexperia, Datasheet Link=https://assets.nexperia.com/documents/data-sheet/PMEG100V100ELPD.pdf, Height=0.82mm, Manufacturer_Part_Number=PMEG100V100ELPDAZ, Mouser Price/Stock=https://www.mouser.co.uk/ProductDetail/Nexperia/PMEG100V100ELPDAZ?qs=64Y9EYqwa9iK90zZrx4xYg%3D%3D
D6: "TVS Diode (Uni-directional)", Manufacturer_Name=Bourns, Mouser Part Number=652-SMF4L60A-Q, Datasheet Link=https://bourns.com/docs/product-datasheets/smf4l-q.pdf, Height=1.35mm, Manufacturer_Part_Number=SMF4L60A-Q, Mouser Price/Stock=https://www.mouser.co.uk/ProductDetail/Bourns/SMF4L60A-Q?qs=iLbezkQI%252BsjmazDMS%252BOglQ%3D%3D
D7: "Diode", Arrow Part Number=VS-10BQ060-M3/5BT, Manufacturer_Name=Vishay, Mouser Part Number=78-VS-10BQ060-M35BT, Arrow Price/Stock=https://www.arrow.com/en/products/vs-10bq060-m35bt/vishay, Datasheet Link=https://componentsearchengine.com/Datasheets/1/VS-10BQ060-M3_5BT.pdf, Height=2.44mm, Manufacturer_Part_Number=VS-10BQ060-M3/5BT, Mouser Price/Stock=https://www.mouser.co.uk/ProductDetail/Vishay-Semiconductors/VS-10BQ060-M3-5BT/?qs=asPD7ZL2j3Xpjq4X%2F1O06Q%3D%3D
D8: "Diode", Manufacturer_Name=Vishay, Mouser Part Number=78-1N4148W-G3-08, Arrow Part Number=1N4148W-G3-08, Arrow Price/Stock=https://www.arrow.com/en/products/1n4148w-g3-08/vishay, Datasheet Link=https://componentsearchengine.com/Datasheets/1/1N4148W-G3-08.pdf, Height=1.35mm, Manufacturer_Part_Number=1N4148W-G3-08, Mouser Price/Stock=https://www.mouser.co.uk/ProductDetail/Vishay-Semiconductors/1N4148W-G3-08?qs=uS%252BVSIFnvp46StDBB15x4Q%3D%3D
IC1: "Integrated Circuit", Manufacturer_Name=Infineon, Mouser Part Number=942-IR7184STRPBF, Arrow Part Number=IR7184STRPBF, Arrow Price/Stock=https://www.arrow.com/en/products/ir7184strpbf/infineon-technologies-ag, Datasheet Link=https://componentsearchengine.com/Datasheets/1/IR7184STRPBF.pdf, Height=1.75mm, Manufacturer_Part_Number=IR7184STRPBF, Mouser Price/Stock=https://www.mouser.com/Search/Refine.aspx?Keyword=942-IR7184STRPBF
IC2: "Integrated Circuit", Manufacturer_Name="Texas Instruments", Mouser Part Number=595-TL2575HV-12IKTTR, Arrow Part Number=TL2575HV-12IKTTR, Arrow Price/Stock=https://www.arrow.com/en/products/tl2575hv-12ikttr/texas-instruments?region=nac, Datasheet Link=http://www.ti.com/lit/ds/symlink/tl2575-15.pdf, Height=5.13mm, Manufacturer_Part_Number=TL2575HV-12IKTTR, Mouser Price/Stock=https://www.mouser.co.uk/ProductDetail/Texas-Instruments/TL2575HV-12IKTTR?qs=EnLMdcWnKADDmW7d51Om1g%3D%3D
IC3: "Integrated Circuit", Manufacturer_Name="Texas Instruments", Mouser Part Number=595-UA78M33CKVURG3, Arrow Part Number=UA78M33CKVURG3, Arrow Price/Stock=https://www.arrow.com/en/products/ua78m33ckvurg3/texas-instruments, Datasheet Link=https://www.ti.com/lit/gpn/ua78m?HQS=ti-null-null-sf-df-pf-sep-wwe&DCM=yes, Height=2.52mm, Manufacturer_Part_Number=UA78M33CKVURG3, Mouser Price/Stock=https://www.mouser.co.uk/ProductDetail/Texas-Instruments/UA78M33CKVURG3?qs=0O%2FZFlpUpJXrDg4gfD1Q2g%3D%3D
IC4: "Integrated Circuit", Arrow Part Number=MCP100T-315I/TT, Manufacturer_Name=Microchip, Mouser Part Number=579-MCP100T-315I/TT, Arrow Price/Stock=https://www.arrow.com/en/products/mcp100t-315itt/microchip-technology?region=nac, Datasheet Link=http://docs-emea.rs-online.com/webdocs/0d03/0900766b80d034b8.pdf, Height=1.12mm, Manufacturer_Part_Number=MCP100T-315I/TT, Mouser Price/Stock=https://www.mouser.co.uk/ProductDetail/Microchip-Technology/MCP100T-315I-TT?qs=cQYLKLPzRJnnE4Sa6znIFg%3D%3D
IC5: "Integrated Circuit", Manufacturer_Name="Analog Devices", Mouser Part Number=584-LTC2944CDDPBF, Arrow Part Number=LTC2944CDD#PBF, Arrow Price/Stock=https://www.arrow.com/en/products/ltc2944cddpbf/analog-devices, Datasheet Link=https://www.analog.com/media/en/technical-documentation/data-sheets/2944fa.pdf, Height=0.8mm, Manufacturer_Part_Number=LTC2944CDD#PBF, Mouser Price/Stock=https://www.mouser.co.uk/ProductDetail/Analog-Devices/LTC2944CDDPBF?qs=u4fy%2FsgLU9Omd44j%252B6inEQ%3D%3D
J1: "Zero ohm resistor"
L1: "Inductor 54uH"
L2: "Inductor 2uH", Arrow Part Number=SRP1038C-100M, Manufacturer_Name=Bourns, Mouser Part Number=652-SRP1038C-100M, Arrow Price/Stock=https://www.arrow.com/en/products/srp1038c-100m/bourns, Datasheet Link=https://www.bourns.com/data/global/pdfs/SRP1038A.pdf, Height=4mm, Manufacturer_Part_Number=SRP1038C-100M, Mouser Price/Stock=https://www.mouser.co.uk/ProductDetail/Bourns/SRP1038C-100M?qs=PzGy0jfpSMvAa%252BP05u%252BK2w%3D%3D
L3: library part IHLP2525CZER220M11, "Inductor 22uH", Manufacturer_Name=Vishay, Mouser Part Number=70-IHLP2525CZER220, Arrow Part Number=IHLP2525CZER220M11, Arrow Price/Stock=https://www.arrow.com/en/products/ihlp2525czer220m11/vishay?region=europe, Datasheet Link=https://componentsearchengine.com/Datasheets/1/IHLP2525CZER220M11.pdf, Height=3mm, Manufacturer_Part_Number=IHLP2525CZER220M11, Mouser Price/Stock=https://www.mouser.co.uk/ProductDetail/Vishay-Dale/IHLP2525CZER220M11?qs=sy7P%252B1cA09hqmhD2Kelr6g%3D%3D
L4: library part 7447789233, "Inductor 330uH", Manufacturer_Name="Wurth Elektronik", Manufacturer_Part_Number=7447789233
P1 P5: "Header, 3-Pin", LatestRevisionDate=17-Jul-2002, LatestRevisionNote="Re-released for DXP Platform.", Publisher="Altium Limited"
P2 P3: "Header, 2-Pin", LatestRevisionDate=17-Jul-2002, LatestRevisionNote="Re-released for DXP Platform.", Publisher="Altium Limited"
P4: "Header, 12-Pin, Dual row", LatestRevisionDate=17-Jul-2002, LatestRevisionNote="Re-released for DXP Platform.", Publisher="Altium Limited"
Q1: "NPN transistor", Manufacturer_Name="ON Semiconductor", Mouser Part Number=863-MMBT2222ALT1G, Arrow Part Number=MMBT2222ALT1G, Arrow Price/Stock=https://www.arrow.com/en/products/mmbt2222alt1g/on-semiconductor, Datasheet Link=http://www.onsemi.com/pub/Collateral/MMBT2222LT1-D.PDF, Height=1.11mm, Manufacturer_Part_Number=MMBT2222ALT1G, Mouser Price/Stock=https://www.mouser.co.uk/ProductDetail/onsemi/MMBT2222ALT1G?qs=HVbQlW5zcXWwnD7Jokybqg%3D%3D
Q2: "MOSFET (N-Channel)", Manufacturer_Name=Vishay, Mouser Part Number=78-SIR120DP-T1-RE3, Arrow Part Number=SIR120DP-T1-RE3, Arrow Price/Stock=https://www.arrow.com/en/products/sir120dp-t1-re3/vishay, Datasheet Link=http://www.vishay.com/docs/79731/sir120dp.pdf, Manufacturer_Part_Number=SIR120DP-T1-RE3, Mouser Price/Stock=https://www.mouser.co.uk/ProductDetail/Vishay-Semiconductors/SIR120DP-T1-RE3?qs=UkDUCjYnTB3xEXzKpvDZuA%3D%3D
Q3 Q4: "MOSFET (P-Channel)"
Q5: "Transistor BJT PNP", Manufacturer_Name="Diodes Inc.", Mouser Part Number=522-FMMT493ATA, Arrow Part Number=FMMT493ATA, Arrow Price/Stock=https://www.arrow.com/en/products/fmmt493ata/diodes-incorporated, Datasheet Link=https://datasheet.datasheetarchive.com/originals/distributors/Datasheets_SAMA/813f9dcbae48594177f25ecf9038d058.pdf, Height=1.1mm, Manufacturer_Part_Number=FMMT493ATA, Mouser Price/Stock=https://www.mouser.co.uk/ProductDetail/Diodes-Incorporated/FMMT493ATA?qs=GBLSl2AkiruoD9OMdIH%252BaQ%3D%3D
R1 R12: library part MCWR12X1003FTL, "Resistor 100k", LatestRevisionDate=29-May-2009, LatestRevisionNote="IPC-7351 Footprint Added.", PackageDescription="Chip Resistor", PackageReference=J1-0603, Published=8-Jun-2000, Publisher="Altium Limited", Supplier 1=Farnell
R2 R16: library part CRGCQ1206F8K2, "Resistor 8.2k", LatestRevisionDate=29-May-2009, LatestRevisionNote="IPC-7351 Footprint Added.", PackageDescription="Chip Resistor", PackageReference=J1-0603, Published=8-Jun-2000, Publisher="Altium Limited", Supplier 1=Mouser
R3: "Resistor 100m", LatestRevisionDate=29-May-2009, LatestRevisionNote="IPC-7351 Footprint Added.", PackageDescription="Chip Resistor", PackageReference=J1-0603, Published=8-Jun-2000, Publisher="Altium Limited", Supplier 1=Mouser
R4: "Resistor 1 3W", LatestRevisionDate=29-May-2009, LatestRevisionNote="IPC-7351 Footprint Added.", PackageDescription="Chip Resistor", PackageReference=J1-0603, Published=8-Jun-2000, Publisher="Altium Limited", Supplier 1=Farnell
R5: library part MCWR12X1000FTL, "Resistor 100", LatestRevisionDate=29-May-2009, LatestRevisionNote="IPC-7351 Footprint Added.", PackageDescription="Chip Resistor", PackageReference=J1-0603, Published=8-Jun-2000, Publisher="Altium Limited", Supplier 1=Farnell
R6: "Resistor 47k", LatestRevisionDate=29-May-2009, LatestRevisionNote="IPC-7351 Footprint Added.", PackageDescription="Chip Resistor", PackageReference=J1-0603, Published=8-Jun-2000, Publisher="Altium Limited", supplier=farnell
R7: "Resistor 8.2", LatestRevisionDate=29-May-2009, LatestRevisionNote="IPC-7351 Footprint Added.", PackageDescription="Chip Resistor", PackageReference=J1-0603, Published=8-Jun-2000, Publisher="Altium Limited", Supplier 1=Farnell
R8: library part MCHP06W2F1001T5E, "Resistor 1k", LatestRevisionDate=29-May-2009, LatestRevisionNote="IPC-7351 Footprint Added.", PackageDescription="Chip Resistor", PackageReference=J1-0603, Published=8-Jun-2000, Publisher="Altium Limited", supplier=farnell, Supplier 1=Farnell
R9: "Resistor 50m", Manufacturer_Name=Vishay, Mouser Part Number=71-WSHM2818R0500FEB, Datasheet Link=https://componentsearchengine.com/Datasheets/2/WSHM2818R0500FEB.pdf, Height=1.75mm, Manufacturer_Part_Number=WSHM2818R0500FEB, Mouser Price/Stock=https://www.mouser.com/Search/Refine.aspx?Keyword=71-WSHM2818R0500FEB
R10: "Resistor 10k", LatestRevisionDate=29-May-2009, LatestRevisionNote="IPC-7351 Footprint Added.", PackageDescription="Chip Resistor", PackageReference=J1-0603, Published=8-Jun-2000, Publisher="Altium Limited", Supplier 1=Farnell
R11: "Shunt resistor 0.015", LatestRevisionDate=17-Jul-2002, LatestRevisionNote="Re-released for DXP Platform.", PackageDescription="Axial Device, Thru-Hole; 2 Leads; 0.3 in Pin Spacing", PackageReference=AXIAL-0.3, Published=8-Jun-2000, Publisher="Altium Limited", Supplier 1=Mouser
R13 R14 R15 R18: "Resistor 1k", LatestRevisionDate=29-May-2009, LatestRevisionNote="IPC-7351 Footprint Added.", PackageDescription="Chip Resistor", PackageReference=J1-0603, Published=8-Jun-2000, Publisher="Altium Limited", supplier=farnell, Supplier 1=Farnell
R17: "Resistor 100k", LatestRevisionDate=29-May-2009, LatestRevisionNote="IPC-7351 Footprint Added.", PackageDescription="Chip Resistor", PackageReference=J1-0603, Published=8-Jun-2000, Publisher="Altium Limited", Supplier 1=Farnell
VS-1: "Schottky Rectifier / VS-10BQ060-M3/5BT", ComponentLink1Description="Manufacturer Link", ComponentLink1URL=http://www.irf.com/, ComponentLink2Description=Datasheet, ComponentLink2URL=http://www.irf.com/product-info/datasheets/data/10tq.pdf, DatasheetVersion=PD-2.057B, LatestRevisionDate=17-Jul-2002, LatestRevisionNote="Re-released for DXP Platform.", Note="Terminal 2 is the TAB and is electrically connected to the cathode", PackageDescription="TO, Thru-Hole, Vertical, Heatsink Mounted; 3 In-Line Leads (1 Absent); Pitch 2.54 mm", PackageReference=TO-220AC, PackageVersion=Feb-1998, Published=8-Jun-2000, Publisher="Altium Limited"
W1 W2: "Jumper Wire", LatestRevisionDate=17-Jul-2002, LatestRevisionNote="Re-released for DXP Platform.", PackageDescription="Radial Cap, Thru-Hole; 2 Leads; 0.2 in Pin Spacing", PackageReference=RAD-0.2, Published=24-Mar-1999, Publisher="Altium Limited"
Z1: "Zener Diode", Manufacturer_Name="ON Semiconductor", Mouser Part Number=863-MMSZ5263BT1G, Arrow Part Number=MMSZ5263BT1G, Arrow Price/Stock=https://www.arrow.com/en/products/mmsz5263bt1g/on-semiconductor?region=nac, Datasheet Link=http://www.onsemi.com/pub/Collateral/MMSZ5221BT1-D.PDF, Height=1.35mm, Manufacturer_Part_Number=MMSZ5263BT1G, Mouser Price/Stock=https://www.mouser.co.uk/ProductDetail/onsemi/MMSZ5263BT1G?qs=ZpPixqFcBtxaamSEBIiIIg%3D%3D
Z2: "Zener Diode"

## Free pads (board coordinates)
  round 1.524 hole 3.4: 2(86.741,124.46) 3(27.94,124.46) 4(27.94,29.845) 5(86.995,30.099)

## Via types
v1: diameter 1.27, hole 0.711, Top Layer to Bottom Layer, 46 vias

## Nets (pads, with @x,y where several pads share a name; then routed paths per layer and width w, separated by ;. In a path a pad name is that pad's centre, name@x,y a point inside that pad or via, vN(x,y) a via of type N, cw(c..) or ccw(c..) an arc to the next point about the centre after c; other vN are vias at no path point)
+3V3: C21.2 C22.2 IC3.3 IC4.2 P4.1 R13.2 R14.2 R15.2 TP7.5 W2.2
  other v1: 81.534,33.147 64.516,58.547 86.868,60.96 76.073,72.009
+12: C15.2 C19.1 D7.2 IC1.5 IC2.4 L3.1 L4.2 P4.3 W1.2 | length 0.2
  Top Layer w0.254: IC2.4 IC2.4@52.578,50.976
  Bottom Layer w0.254: v1(69.85,90.424) v1@70.002,90.424
  other v1: 81.026,41.402 52.959,54.737 69.596,88.646 66.294,106.68
GND: C1.1 C2.1 C3.1 C4.1 C5.2 C6.2 C7.2 C9.2 C10.2 C11.2 C12.2 C13.1 C14.2 C15.1 C17.1 C18.2 C19.2 C20.1 C21.1 C22.1 C23.1 C24.1 D6.2 IC1.3 IC2.3 IC2.5 IC2.6 IC3.2 IC4.3 IC5.2 IC5.3 IC5.7 IC5.9 P1.1 P2.2 P3.2 P4.2 P4.4 P4.6 P4.8 P4.10 P4.12 P4.14 P4.16 P4.18 P4.20 P4.22 P4.23 P4.24 P5.3 Q1.2 Q5.2 R2.1 R4.1 R6.1 R8.1 R9.1 R16.1 TP5.5 VS-1.2
  other v1: 75.946,46.99 76.2,52.451 53.721,58.293 62.357,58.928 66.04,62.738 42.164,63.881 56.896,72.136 87.63,73.787 86.868,84.328 51.689,84.963 61.087,87.249 44.577,90.297 44.577,92.456 74.295,94.488 43.053,113.03 51.689,119.38 47.371,125.095
NetC1_2: C1.2 C2.2 C3.2 D1.1 D1.2 D2.1 D2.2 D3.1 D3.2 P1.3
NetC4_2: C4.2 P4.7 R1.1 R2.2 | length 70.1
  Layer 1 w0.254: v1(61.214,84.963) 68.453,84.963 81.661,71.755 81.661,64.897 71.882,55.118 71.882,42.523 68.453,39.094 P4.7
NetC5_1: C5.1 C6.1 C7.1 C8.1 C17.2 C18.1 D1.3 D2.3 D3.3 IC2.1 L1.1 R1.2 TP1.5
  other v1: 33.782,45.339 37.211,45.339 40.386,45.339 44.069,101.854 41.402,101.981 39.878,104.013
NetC8_2: C8.2 R4.2
NetC9_1: C9.1 C10.1 C11.1 C12.1 C13.2 C14.1 D4.3 D5.3 L2.1
NetC16_1: C16.1 D4.1 D4.2 D5.1 D5.2 IC1.6 L1.2 Q2.5 Q2.7 | length 13.8
  Bottom Layer w0.254: L1.2 65.659,101.63 65.659,94.701 67.599,92.761 C16.1 68.237,92.799 71.545,92.799 IC1.6
NetC16_2: C16.2 D7.1 IC1.8 | length 10
  Bottom Layer w0.254: C16.2 70.561,95.961 71.145,95.377 IC1.8@71.318,95.377 ; D7.1 71.12,95.575 IC1.8@71.318,95.377 ; IC1.8 IC1.8@71.318,95.377
NetC20_2: C20.2 IC3.1 L3.2 TP6.5 | length 4.3
  Top Layer w0.254: TP6.5 75.565,61.595 75.819,61.595 75.839,61.575 76.906,61.575 C20.2
NetC23_2: C23.2 P4.9 R12.1 R16.2 | length 70
  Top Layer w0.254: R16.2@58.901,78.156 R16.2
  Layer 1 w0.254: v1(52.451,80.01) 52.578,80.137 56.769,80.137 60.325,76.581 68.453,76.581 77.851,67.183 77.851,64.125 65.913,52.187 P4.9
NetC24_2: C24.2 D6.1 D8.1 IC5.1 R3.2 R11.1 TP2.5 TP8.5 Z1.1 | length 11.1
  Top Layer w0.16: IC5.1 57.706,67.322 R11.1
  Top Layer w0.254: v1(50.292,68.326) 50.292,65.913 TP8.5
  Bottom Layer w0.254: R3.2 53.638,60.846 57.461,57.023 TP2.5
  other v1: 62.357,60.706 50.292,70.485 47.752,90.17 47.752,92.202
NetD8_2: D8.2 R10.1
NetIC1_1: IC1.1 P4.5 | length 76
  Bottom Layer w0.254: P4.5 70.993,34.925 72.644,36.576 79.883,36.576 83.185,39.878 83.185,92.18 79.988,95.377 IC1.1
NetIC1_2: IC1.2 P4.11 Q1.3 | length 74.2
  Bottom Layer w0.254: P4.11@63.373,32.797 63.373,52.324 66.802,55.753 72.876,55.753 74.803,57.68 74.803,65.151 75.565,65.913 75.565,69.042 Q1.3@75.392,69.215 ; Q1.3 Q1.3@75.392,69.215 ; IC1.2 79.121,94.107 79.629,93.599 79.629,73.476 75.741,69.588 75.741,69.388 75.568,69.215 Q1.3@75.392,69.215
NetIC1_4: IC1.4 R7.1 TP3.5 | length 7.2
  Bottom Layer w0.254: TP3.5 75.418,88.031 76.41,88.031 R7.1 76.835,91.395 IC1.4
NetIC1_7: IC1.7
NetIC2_2: IC2.2 L4.1 VS-1.1 | length 1.4
  Top Layer w0.254: IC2.2@55.929,49.527 IC2.2
NetIC4_1: IC4.1 J1.1 | length 0
  Top Layer w0.254: J1.1@80.357,77.817 J1.1
NetIC5_4: IC5.4 P4.19 R14.1 | length 42.4
  Top Layer w0.16: IC5.4 57.682,62.968 59.079,61.571 R14.1@59.898,61.571
  Top Layer w0.254: v1(57.277,61.214) 58.113,60.378 58.705,60.378 59.898,61.571 R14.1 R14.1@59.725,62.044
  Layer 1 w0.254: P4.19 53.213,49.276 60.232,56.295 60.232,58.259 v1(57.277,61.214)
NetIC5_5: IC5.5 P4.17 R13.1 | length 52.8
  Top Layer w0.16: IC5.5@60.656,65.786 69.723,65.786 R13.1
  Top Layer w0.254: R13.1 70.104,64.516 71.12,63.5 v1(71.247,63.5)
  Layer 1 w0.254: P4.17 55.753,47.879 60.833,52.959 62.23,52.959 66.548,57.277 66.548,59.69 67.209,60.351 69.852,60.351 72.124,62.623 v1(71.247,63.5)
NetIC5_6: IC5.6 P4.15 R15.1 | length 57.3
  Top Layer w0.16: IC5.6@60.712,66.294 63.5,66.294 64.74,67.534 ; R15.1@65.732,67.534 R15.1
  Top Layer w0.254: v1(63.334,67.984) 63.609,67.984 64.059,67.534 64.74,67.534 R15.1@65.732,67.534
  Layer 1 w0.254: P4.15 58.293,46.609 67.183,55.499 67.31,55.499 74.549,62.738 74.549,62.992 71.501,66.04 65.278,66.04 v1(63.334,67.984)
NetIC5_8: IC5.8 Q3.5 Q3.7 R11.2 R12.2 | length 2.8
  Top Layer w0.16: IC5.8 R11.2@60.682,69.699
  Top Layer w0.254: R11.2@60.682,69.699 R11.2 ; R12.2@62.182,72.239 R12.2 R12.2@62.46,72.311
NetJ1_2: J1.2 P4.13 | length 67.2
  Layer 1 w0.254: P4.13 62.23,31.623 77.724,31.623 83.566,37.465 83.566,75.184 v1(86.233,77.851)
NetL2_2: L2.2 R3.1
NetP2_1: P2.1 W1.1 | length 10.7
  Top Layer w0.254: W1.1 68.694,42.799 69.075,43.18 P2.1
NetP3_1: P3.1 W2.1 | length 0.4
  Bottom Layer w0.254: P3.1@78.613,54.483 P3.1
NetP4_21: P4.21 R18.1 | length 37.6
  Top Layer w0.254: v1(40.64,62.127) 40.64,62.105 43.388,59.357 R18.1
  Layer 1 w0.254: v1@40.386,62.103 50.673,51.816 P4.21
NetP5_1: P5.1 Q4.5 Q4.7 R10.2 TP9.5
NetQ1_1: Q1.1 R5.2
NetQ2_1: Q2.1 R6.2 R7.2 | length 23.4
  Bottom Layer w0.254: Q2.1 62.738,95.92 62.916,95.742 63.008,95.742 63.5,95.25 63.5,93.512 66.929,90.083 66.929,84.628 67.078,84.479 R6.2 76.708,84.479 R7.2
NetQ2_2: Q2.2 Q2.3 Q2.4 R9.2 TP4.5 | length 5.6
  Bottom Layer w0.254: R9.2 60.688,90.546 62.461,88.773 TP4.5
NetQ3_1: Q3.1 Q4.1 R17.2 Z2.1 Z2.2 | length 37.9
  Top Layer w0.254: Q4.1 41.656,80.01 38.039,76.393 Z2.1 Z2.2 44.888,69.158 46.609,67.437 R17.2 ; Q3.1 45.466,77.038 46.101,77.673 46.101,80.239 v1(46.863,81.001)
  Layer 1 w0.254: v1(40.513,78.867) 42.647,81.001 v1(46.863,81.001)
NetQ3_2: Q3.2 Q3.3 Q3.4 Q4.2 Q4.3 Q4.4 Z2.3 | length 6.3
  Top Layer w0.254: Z2.3 38.989,73.711 41.656,76.378 Q3.4
NetQ5_1: Q5.1 R18.2 | length 6.2
  Top Layer w0.254: R18.2 43.988,62.357 47.611,58.734 47.899,58.734 48.072,58.561 Q5.1
NetQ5_3: Q5.3 R17.1 | length 4
  Top Layer w0.254: R17.1 46.655,63.224 46.655,62.438 48.49,60.603 48.955,60.603 Q5.3
NetR5_1: R5.1 R8.2 Z1.2
pads on no net: P1.2 P5.2

## Polygon pours and split planes (outlines as drawn)
GND on Top Layer "GND_L01_P098" (solid, pour order 98): 25.4,127 89.408,127 89.408,27.686 25.4,27.686
NetC24_2 on Top Layer "NETC24_2_L01_P031" (solid, pour order 31): 58.42,68.707 58.42,72.444 56.769,73.406 51.562,73.406 51.562,69.088 52.197,68.453 58.166,68.453
NetC5_1 on Top Layer "NETC5_1_L01_P001" (solid, pour order 1): 55.245,123.571 55.245,104.648 69.469,104.648 76.454,97.663 82.423,97.663 82.423,115.951 74.803,123.571
+3V3 on Top Layer "+3V3_L01_P039" (solid, pour order 39): 59.182,59.309 65.532,59.309 65.532,56.134 59.182,56.134
NetC20_2 on Top Layer "NETC20_2_L01_P084" (solid, pour order 84): 80.01,62.865 75.057,62.865 74.295,61.849 74.295,59.563 76.581,59.563 81.915,54.229 81.915,51.689 85.471,51.689 85.471,55.372 80.01,60.833
NetC23_2 on Top Layer "NETC23_2_L01_P033" (solid, pour order 33): 61.341,74.676 63.373,74.676 63.373,76.073 62.484,76.962 61.595,76.962 60.706,77.851 60.706,78.867 54.102,78.867 53.975,78.74 53.975,76.454 58.928,76.454
NetC5_1 on Top Layer "NETC5_1_L01_P081" (solid, pour order 81): 59.182,56.134 59.055,56.261 59.055,57.404 40.894,57.404 40.513,57.023 40.513,53.467 49.911,53.467 50.8,54.356 59.182,54.356
NetC5_1 on Top Layer "NETC5_1_L01_P080" (solid, pour order 80): 60.452,55.499 59.817,56.134 57.023,56.134 57.023,56.007 57.023,55.88 57.023,48.895 60.325,48.895 60.452,49.022
+3V3 on Top Layer "+3V3_L01_P091" (solid, pour order 91): 63.246,56.134 66.04,56.134 67.056,57.15 67.056,64.516 63.246,64.516
NetP3_1 on Top Layer "NETP3_1_L01_P090" (solid, pour order 90): 66.802,54.61 70.231,54.61 70.231,54.737 71.755,56.261 79.883,56.261 81.915,54.229 81.915,50.038 75.438,50.038 75.057,50.419 66.929,50.419
NetC24_2 on Top Layer "NETC24_2_L01_P048" (solid, pour order 48): 51.689,73.152 48.641,70.358 45.847,70.358 45.847,68.834 46.863,67.818 46.99,67.818 47.879,67.183 48.133,67.183 52.578,67.183 53.34,67.945 53.34,72.644 53.213,72.771 52.451,72.771
NetC5_1 on Top Layer "NETC5_1_L01_P052" (solid, pour order 52): 31.75,42.291 42.418,42.291 42.418,45.085 42.418,58.42 40.513,60.325 33.147,60.325 33.147,49.53 31.75,48.133 33.147,49.53 31.75,48.133
NetJ1_2 on Top Layer "NETJ1_2_L01_P087" (solid, pour order 87): 82.677,76.835 82.804,76.708 88.265,76.708 88.265,78.867 88.138,78.867 82.677,78.867
NetIC4_1 on Top Layer "NETIC4_1_L01_P086" (solid, pour order 86): 79.629,78.867 81.153,78.867 81.153,74.041 79.629,74.041
NetIC2_2 on Top Layer "NETIC2_2_L01_P082" (solid, pour order 82): 55.118,52.959 57.023,52.959 57.023,48.641 61.087,48.641 64.389,52.197 69.977,52.197 72.39,54.61 75.184,54.61 75.184,50.546 74.676,50.038 67.31,50.038 67.31,48.641 65.659,46.99 55.118,46.99
NetC24_2 on Top Layer "NETC24_2_L01_P079" (solid, pour order 79): 52.578,65.913 53.213,65.278 56.483,65.278 56.483,67.31 57.341,67.629 57.341,67.847 57.341,68.453 52.578,68.453
NetC23_2 on Top Layer "NETC23_2_L01_P078" (solid, pour order 78): 53.975,78.105 53.213,78.74 51.816,78.74 50.8,79.756 50.8,81.661 53.848,81.661 54.737,80.772 54.737,78.867
+12 on Top Layer "+12_L01_P075" (solid, pour order 75): 72.644,94.107 72.644,88.9 71.247,87.503 66.929,87.503 66.929,93.472 67.564,94.107
NetIC5_8 on Top Layer "NETIC5_8_L01_P030" (solid, pour order 30): 59.944,68.707 61.849,68.707 63.373,69.723 63.373,73.152 60.325,73.152 59.944,72.771
NetC4_2 on Top Layer "NETC4_2_L01_P062" (solid, pour order 62): 54.991,86.233 54.991,82.296 55.118,82.296 62.865,82.296 62.865,95.758 59.69,95.758 59.69,86.995 58.928,86.233
NetC5_1 on Top Layer "NETC5_1_L01_P061" (solid, pour order 61): 38.227,106.68 61.595,106.68 61.595,99.568 38.227,99.568
NetC24_2 on Top Layer "NETC24_2_L01_P047" (solid, pour order 47): 46.101,95.25 46.228,95.123 52.324,95.123 52.324,86.803 49.611,84.462 46.101,84.462
+12 on Top Layer "+12_L01_P044" (solid, pour order 44): 51.943,48.895 51.943,53.34 51.181,54.102 51.181,56.007 51.562,56.388 53.467,56.388 53.848,56.007 53.848,53.848 53.721,53.721 53.34,53.34 53.34,48.895
+3V3 on Top Layer "+3V3_L01_P042" (solid, pour order 42): 75.057,38.354 86.106,38.354 86.487,37.973 86.487,32.131 86.106,31.75 75.057,31.75
+3V3 on Top Layer "+3V3_L01_P041" (solid, pour order 41): 83.312,59.817 83.566,59.563 88.519,59.563 88.773,59.817 88.773,62.992 83.312,62.992
+3V3 on Top Layer "+3V3_L01_P040" (solid, pour order 40): 64.643,74.676 79.375,74.676 79.375,74.041 81.153,74.041 81.153,72.009 80.518,71.374 78.613,71.374 78.613,68.199 68.072,68.199 66.675,69.596 64.643,69.596
+12 on Top Layer "+12_L01_P038" (solid, pour order 38): 69.977,41.656 79.502,41.656 82.042,44.196 82.042,45.466 86.487,45.466 86.487,39.751 85.598,38.862 69.977,38.862
+12 on Top Layer "+12_L01_P037" (solid, pour order 37): 67.31,45.847 76.835,45.847 77.724,46.736 80.772,46.736 82.042,45.466 86.487,45.466 86.487,47.752 84.201,50.038 67.31,50.038
NetIC5_8 on Top Layer "NETIC5_8_L01_P034" (solid, pour order 34): 41.021,70.739 41.021,70.866 41.021,75.438 45.593,75.438 46.355,76.2 60.325,76.2 63.373,73.152 63.373,69.723 61.849,68.707 59.944,68.707 59.944,72.898 59.309,73.533 51.689,73.533 48.768,70.612 41.021,70.612
NetD8_2 on Top Layer "NETD8_2_L01_P029" (solid, pour order 29): 50.419,99.568 50.419,96.139 49.911,96.139 49.784,96.139 40.513,96.139 40.513,99.568
NetP5_1 on Top Layer "NETP5_1_L01_P028" (solid, pour order 28): 41.148,84.455 46.101,84.455 46.101,95.25 45.466,95.885 35.56,95.885 27.94,88.265 27.94,74.549 33.909,74.549 36.83,77.47 36.83,80.137
NetQ3_2 on Top Layer "NETQ3_2_L01_P027" (solid, pour order 27): 42.418,83.82 42.418,78.613 41.148,77.343 41.148,75.946 44.577,75.946 44.704,75.946 44.704,81.153 45.974,82.423 45.974,83.82
NetC4_2 on Top Layer "NETC4_2_L01_P003" (solid, pour order 3): 52.578,90.551 52.578,95.631 52.451,95.758 62.865,95.758 62.865,90.043 52.578,90.043 52.578,90.424
NetC5_1 on Top Layer "NETC5_1_L01_P002" (solid, pour order 2): 53.721,96.508 58.11,96.508 61.722,96.508 61.722,106.045 55.626,106.553 55.499,106.426 55.499,100.457 53.721,98.679
NetC1_2 on Top Layer "NETC1_2_L01_P000" (solid, pour order 0): 26.289,115.443 37.211,115.443 37.211,119.253 37.211,119.888 49.911,119.888 50.546,119.253 50.546,102.489 54.991,102.489 54.991,102.616 54.991,123.571 29.718,123.571 26.289,123.571
GND on Bottom Layer "GND_L04_P103" (solid, pour order 103): 89.408,127 25.4,127 25.4,27.686 89.408,27.686
NetC9_1 on Bottom Layer "NETC9_1_L04_P017" (solid, pour order 17): 39.243,52.07 34.036,52.07 34.036,83.058 36.068,83.058 44.196,74.93 44.069,74.803 44.069,52.197
NetC5_1 on Bottom Layer "NETC5_1_L04_P015" (solid, pour order 15): 81.915,99.822 78.359,99.822 77.597,100.584 77.597,109.22 59.182,109.22 54.864,113.538 40.767,113.538 40.767,110.49 39.878,109.601 35.306,109.601 35.306,121.412 36.068,122.174 79.502,122.174 81.915,119.761
NetC24_2 on Bottom Layer "NETC24_2_L04_P024" (solid, pour order 24): 56.515,63.627 60.87,63.627 66.04,60.881 66.04,56.134 60.706,56.134 60.579,56.134 59.944,56.642 59.944,57.785 57.912,59.817 56.515,59.817
NetC24_2 on Bottom Layer "NETC24_2_L04_P019" (solid, pour order 19): 51.435,62.23 51.435,50.673 55.118,50.673 55.118,54.991 55.118,62.23
NetC24_2 on Bottom Layer "NETC24_2_L04_P020" (solid, pour order 20): 60.071,63.627 56.515,63.627 55.118,62.23 51.435,62.23 51.435,59.563 59.182,59.563 60.071,60.452
NetR5_1 on Bottom Layer "NETR5_1_L04_P021" (solid, pour order 21): 58.039,65.659 57.912,65.659 57.785,65.659 57.785,69.088 70.358,69.088 70.739,68.834 70.739,68.707 70.739,66.04 70.358,65.659
NetP2_1 on Bottom Layer "NETP2_1_L04_P102" (solid, pour order 102): 79.883,44.069 66.23,44.069 65.596,43.434 65.596,40.513 79.311,40.513 79.883,41.084
NetP3_1 on Bottom Layer "NETP3_1_L04_P101" (solid, pour order 101): 79.756,55.118 79.756,53.34 73.533,53.34 71.755,51.562 66.548,51.562 66.548,54.356 67.31,55.118
+12 on Bottom Layer "+12_L04_P071" (solid, pour order 71): 69.596,92.075 68.326,90.805 68.326,87.63 72.517,87.63 72.517,92.075
NetC9_1 on Bottom Layer "NETC9_1_L04_P011" (solid, pour order 11): 57.658,100.457 56.134,100.457 36.703,100.457 34.036,97.79 34.036,83.058 42.164,74.93 65.151,74.93 65.151,80.391 63.881,82.105 56.451,82.105 51.816,86.741 51.816,95.377 57.658,95.377
NetQ1_1 on Bottom Layer "NETQ1_1_L04_P022" (solid, pour order 22): 73.66,68.707 72.263,68.707 72.263,66.167 70.358,64.262 67.818,64.262 67.818,62.23 73.279,62.23 73.66,62.611
NetL2_2 on Bottom Layer "NETL2_2_L04_P018" (solid, pour order 18): 54.61,67.31 45.085,67.31 45.085,51.943 45.339,52.197 49.784,52.197 49.784,64.135 49.911,64.008 54.991,64.008 54.991,66.929 54.991,64.008 54.991,66.929
NetQ2_2 on Bottom Layer "NETQ2_2_L04_P013" (solid, pour order 13): 61.849,97.028 58.42,97.028 58.42,88.519 62.738,88.519 62.738,93.98 61.849,94.869
+12 on Bottom Layer "+12_L04_P045" (solid, pour order 45): 63.246,109.22 63.246,103.759 77.601,103.759 77.597,103.763 77.597,109.22
NetC8_2 on Bottom Layer "NETC8_2_L04_P016" (solid, pour order 16): 55.753,114.173 55.753,109.601 44.196,109.601 44.196,114.173
NetC16_1 on Bottom Layer "NETC16_1_L04_P009" (solid, pour order 9): 67.818,103.759 45.923,103.759 45.923,100.711 58.42,100.711 58.801,100.33 58.801,97.536 65.151,97.536 67.818,100.203
GND on Layer 2 "GND_L03_P096" (solid, pour order 96): 25.4,127 89.408,127 89.408,27.686 25.4,27.686
+12 on Layer 2 "+12_L03_P046" (solid, pour order 46): 44.069,59.055 44.069,76.469 52.705,83.349 52.705,116.078 59.817,116.078 72.39,116.078 72.39,75.184 60.833,75.184 60.833,58.816
+3V3 on Layer 2 "+3V3_L03_P035" (solid, pour order 35): 60.325,75.565 60.325,57.15 67.183,50.292 82.204,50.292 83.439,49.022 83.439,35.814 75.692,35.814 74.676,34.798 74.676,29.705 76.073,28.448 76.2,28.448 87.376,28.448 88.646,29.718 88.646,75.565
+12 on Layer 2 "+12_L03_P036" (solid, pour order 36): 60.833,62.329 47.343,62.329 44.069,59.055 44.069,51.435 59.436,36.068 83.439,36.068 83.439,49.085 81.216,51.308 65.786,51.308 60.833,56.261
+12 on Layer 2 "+12_L03_P094" (solid, pour order 94): 72.009,37.084 72.009,31.496 74.93,31.496 75.819,32.385 75.819,38.989 71.628,38.989
+12 on Layer 2 "+12_L03_P095" (solid, pour order 95): 72.009,35.052 70.993,36.068 72.009,37.084 73.279,35.814
GND on Layer 1 "GND_L02_P100" (solid, pour order 100): 25.4,127 25.654,127.254 89.408,127.254 89.408,27.94 89.535,27.813 89.408,27.686 25.4,27.686
NetC24_2 on Layer 1 "NETC24_2_L02_P058" (solid, pour order 58): 55.372,61.976 55.372,59.309 63.119,59.309 63.627,59.309 63.627,59.563 63.627,61.595 63.119,61.595 59.563,65.151 59.563,93.345 50.744,93.345 50.744,73.406 57.044,73.406 57.044,64.008 55.372,62.103
NetC24_2 on Layer 1 "NETC24_2_L02_P051" (solid, pour order 51): 45.974,65.786 54.102,65.786 53.975,65.913 53.975,74.93 51.562,74.93 51.562,79.121 53.848,79.121 53.848,93.218 53.721,93.345 45.72,93.345 45.72,66.04
NetC5_1 on Layer 1 "NETC5_1_L02_P053" (solid, pour order 53): 61.976,106.67 61.976,96.266 61.214,95.504 44.323,95.504 43.307,94.488 43.307,43.18 41.275,41.148 33.655,41.148 33.655,104.14 36.185,106.67
NetC5_1 on Layer 1 "NETC5_1_L02_P055" (solid, pour order 55): 43.307,50.8 33.782,50.8 31.115,48.133 31.115,41.402 31.369,41.148 34.671,41.148

## Text inside footprints (layer, text, board x,y; h text height)
P4: Top Overlay "1" at 78.105,33.782 h1.27; Top Overlay "2" at 77.978,30.099 h1.27; Top Overlay "23" at 44.196,32.766 h1.27; Top Overlay "24" at 44.196,29.972 h1.27